# Altium PCB PCB1.PcbDoc
Units mm, origin at the board's own origin, x right, y up, seen from the top; angles counter-clockwise.
Board outline 21 x 32 mm, 2 copper layers (Top Layer, Bottom Layer); 7 components, 5 nets, 28 pads, 6 vias.
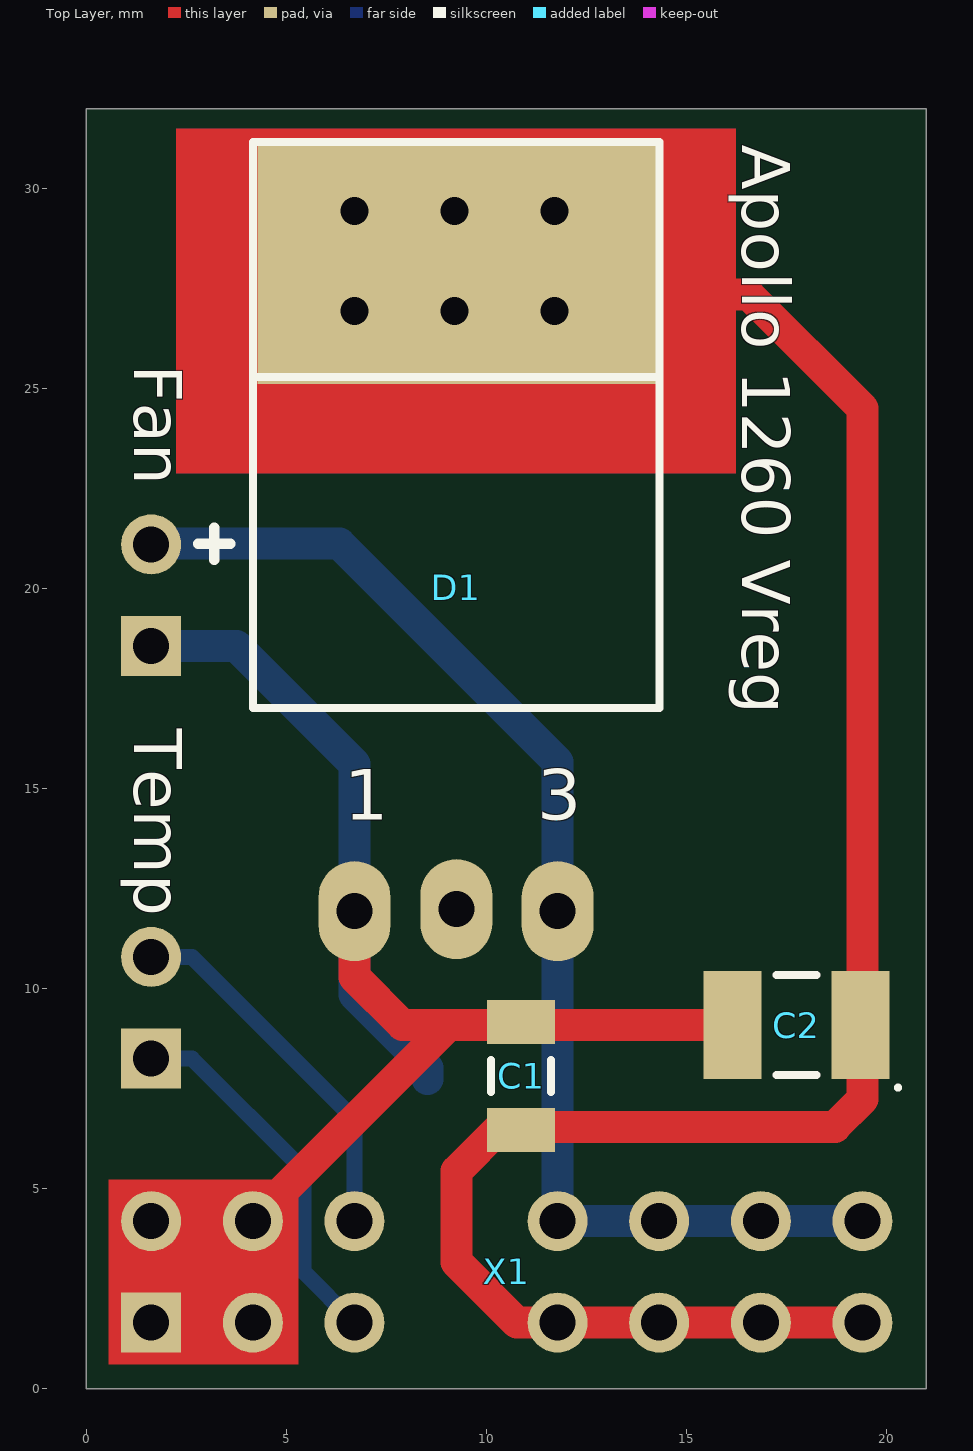
[diagram p0: Top Layer view]
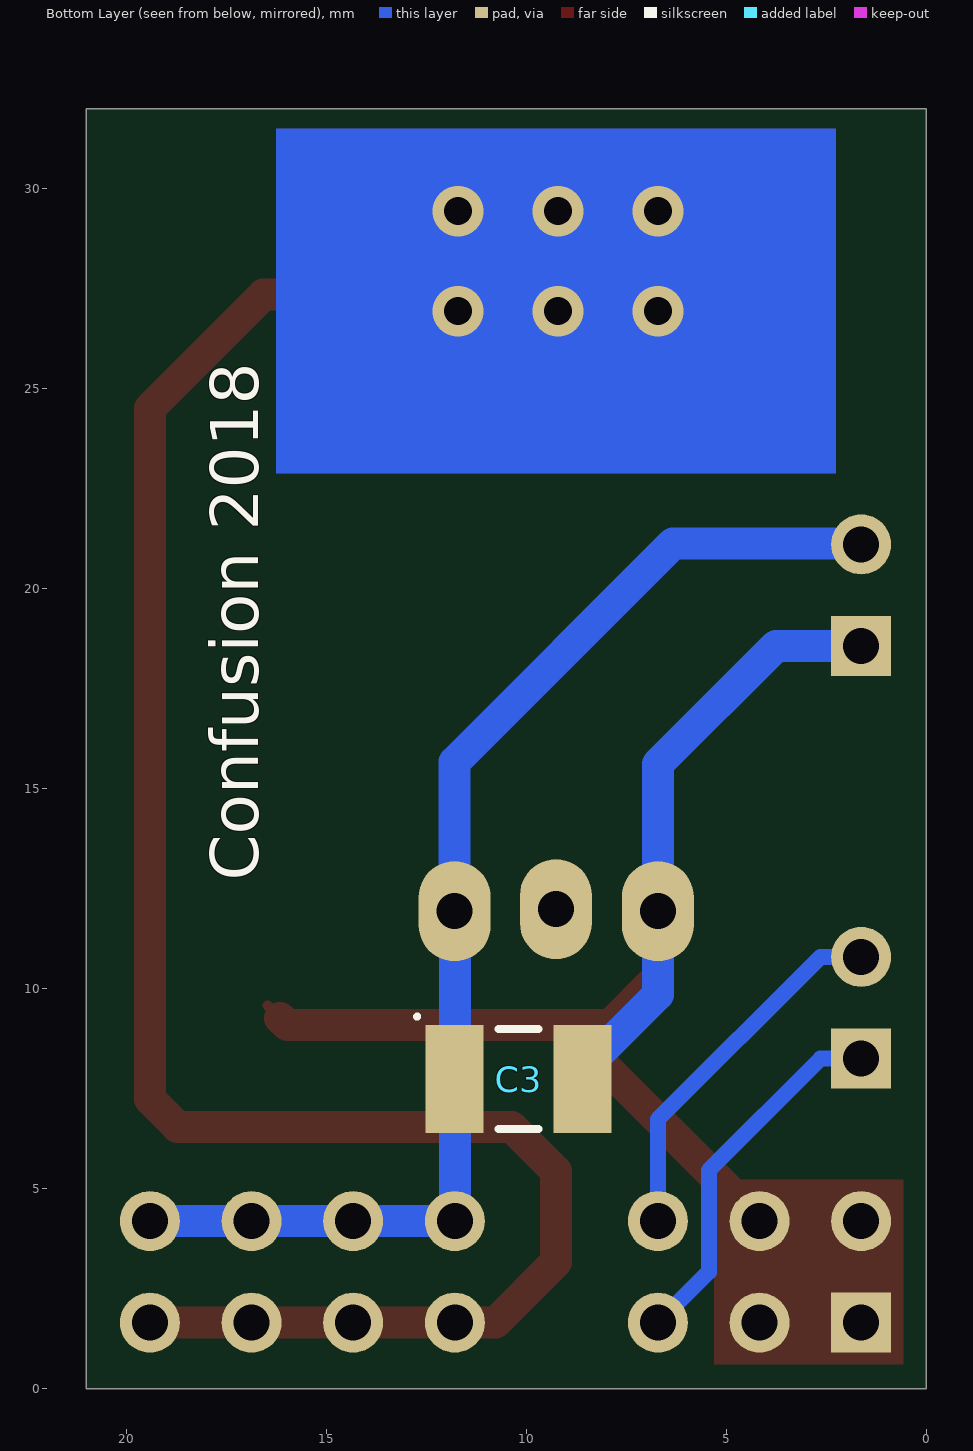
[diagram p1: Bottom Layer view, seen from below]

## Layer stack, top to bottom
Top Solder: solder mask 0.0102, Solder Resist, Dk 3.5
Top Layer: signal copper 0.0356
Dielectric 1: dielectric 0.32, FR-4, Dk 4.8
Bottom Layer: signal copper 0.0356
Bottom Solder: solder mask 0.0102, Solder Resist, Dk 3.5

## Board outline
0,0 21,0 21,32 0,32

## Design rules (kind name [scope] priority, off if disabled: settings)
AssemblyTestPointUsage [All] p1 off:
AssemblyTestpoint [All] p1 off: testpointundercomponent=TRUE minsize=1.016 maxsize=2.54 preferedsize=1.524 minholesize=0 maxholesize=1.016 preferedholesize=0.813 testpointgrid=0.025 usegrid=TRUE gridtolerance=0 allowsidetop=TRUE allowsidebottom=TRUE
Clearance [All] p1: gap=0.2 ignorepadtopadclearanceinfootprint=FALSE except(0: Arc-Hole Track-Hole SMDPad-Hole THPad-Hole Via-Hole Fill-Hole Poly-Hole Region-Hole Text-Hole)
DiffPairsRouting [All] p1 off: maxlimit=0.254 minlimit=0.254 mostfreqgap=0.254 toplayer_minwidth=0.381 toplayer_maxwidth=0.381 toplayer_prefwidth=0.381 bottomlayer_minwidth=0.381 bottomlayer_maxwidth=0.381 bottomlayer_prefwidth=0.381 maxuncoupledlength=12.7
FabricationTestPointUsage [All] p1 off: valid=0 allowmultiple=FALSE
FabricationTestpoint [All] p1 off: side=3 testpointundercomponent=TRUE minsize=1.016 maxsize=2.54 preferedsize=1.524 minholesize=0 maxholesize=1.016 preferedholesize=0.813 testpointgrid=0.025 allowsidetop=TRUE allowsidebottom=TRUE usegrid=TRUE gridtolerance=0
FanoutControl Fanout_BGA [IsBGA] p1 off: bgadir=Out bgaviamode=Centered fanoutstyle=Auto fanoutdirection=Alternating viagrid=0.025 // Fanout_BGA (Default Rule)
FanoutControl Fanout_LCC [IsLCC] p2 off: bgadir=Out bgaviamode=Centered fanoutstyle=Auto fanoutdirection=Alternating viagrid=0.025 // Fanout_LCC (Default Rule)
FanoutControl Fanout_SOIC [IsSOIC] p3 off: bgadir=Out bgaviamode=Centered fanoutstyle=Auto fanoutdirection=Alternating viagrid=0.025 // Fanout_SOIC (Default Rule)
FanoutControl Fanout_Small [(CompPinCount < 5)] p4 off: bgadir=Out bgaviamode=Centered fanoutstyle=Auto fanoutdirection=OutThenIn viagrid=0.025 // Fanout_Small (Default Rule)
FanoutControl Fanout_Default [All] p5 off: bgadir=Out bgaviamode=Centered fanoutstyle=Auto fanoutdirection=Alternating viagrid=0.025 // Fanout_Default (Default Rule)
Height [All] p1 off: minheight=0 maxheight=25.4 prefheight=12.7
HoleSize [All] p1: absolutevalues=TRUE maxlimit=2.54 minlimit=0.5 maxpercent=80.000 minpercent=20.000
MinimumAnnularRing [All] p1: minimumring=0.25
PolygonConnect [All] p1: connectstyle=Relief reliefconductorwidth=0.254 reliefentries=4 polygonreliefangle="90 Angle" airgapwidth=0.254
RoutingVias [All] p1: holewidth=0.711 width=1.27 viastyle="Through Hole" minholewidth=0.711 minwidth=1.27 maxholewidth=0.711 maxwidth=1.27
SolderMaskExpansion [All] p1: expansion=0.102
Width [All] p1: maxlimit=1 minlimit=0.125 preferedwidth=0.8
18 further rules are at their usual default settings.

## Components (designator, comment, footprint, x,y, rotation, side; value= is the part's Value field where it differs from the comment)
C1 "Cap 1206" C1206 10.874,7.818 r90 top
C2 "Cap D" CAPCP3825X06N 17.757,9.088 r180 top
C3 "Cap D" CAPCP3825X06N 10.188,7.742 r180 bottom
D1 "LM1084IT-3.3/NOPB" TO220HS 6.706,11.938 r0 top
Fan "Fan_connector" HDR1X2 1.626,18.567 r90 top (schematic designator X3)
Temp "TH_connector" HDR1X2 1.626,8.255 r90 top (schematic designator X2)
X1 "Apollo_Vreg_connector" Apollo_Vreg_connector 1.626,1.651 r0 top

## Footprints (in the part's own frame and the unit in brackets; to place one, negate y for a bottom-side part, rotate by r counter-clockwise, add the part's x,y. Pads: shape width x height; smd on the part's side, far side on the other; paste and mask are expansions set on the pad)
Apollo_Vreg_connector [mm] "Connector; Header; 8x2 Position"
  rect 1.5x1.5 hole 0.9: 1(0,0)
  round 1.5 hole 0.9: 2(0,2.54) 3(2.54,0) 4(2.54,2.54) 5(5.08,0) 6(5.08,2.54) 7(10.16,0) 8(10.16,2.54) 9(12.7,0) 10(12.7,2.54) 11(15.24,0) 12(15.24,2.54) 13(17.78,0) 14(17.78,2.54)
C1206 [mm] "Chip Capacitor, Body 3.2x1.6mm, IPC High Density"
  rect 1.1x1.7 smd: 1(-1.35,0) 2(1.35,0)
  silkscreen extent -0.4,-0.75 0.4,0.75, body extent -1.7,-0.9 1.7,0.9, height 1.3
CAPCP3825X06N [mm] "Chip Capacitor, 2-Leads, Body 3,81x2,54mm, IPC Medium Density"
  rect 1.45x2.7 smd: 1(-1.6,0) 2(1.6,0)
  silkscreen extent -2.59,-1.25 0.5,1.61, body extent -1.91,-1.27 1.91,1.27, height 0.6
HDR1X2 [mm] "Connector; Header; 2 Position"
  rect 1.5x1.5 hole 0.9: 1(0,0)
  round 1.5 hole 0.9: 2(2.54,0)
TO220HS [mm]
  oval 1.8x2.5 hole 0.9: 1(0.003,-0.001) 2(2.55,0.05) 3(5.083,-0.001)
  rect 10x6 smd: 4(2.575,16.175)
  silkscreen extent -2.54,5.08 7.62,19.23, body extent -2.5,-0.32 7.66,19.17, height 4.3

## Part data
C1: "Capacitor (Semiconductor SIM Model)"
C2 C3: "Polarized Capacitor (Surface Mount)"

## Via types
v1: diameter 1.27, hole 0.7, Top Layer to Bottom Layer, tented bottom, 6 vias

## Nets (pads, with @x,y where several pads share a name; then routed paths per layer and width w, separated by ;. In a path a pad name is that pad's centre, name@x,y a point inside that pad or via, vN(x,y) a via of type N, cw(c..) or ccw(c..) an arc to the next point about the centre after c; other vN are vias at no path point)
3.3V: C1.1 C2.1 D1.4 X1.7 X1.9 X1.11 X1.13 | length 52.5
  Top Layer w0.8: D1.4@9.281,27.351 16.566,27.351 19.406,24.511 19.406,7.239 18.715,6.548 10.366,6.548 9.256,5.438 9.256,3.165 10.77,1.651 X1.7 X1.9 X1.11 X1.13
  other v1: 6.706,26.938 9.206,26.938 11.706,26.938 6.706,29.438 9.206,29.438 11.706,29.438
5V: C3.1 D1.3 Fan.2 X1.8 X1.10 X1.12 X1.14 | length 31.4
  Bottom Layer w0.254: D1.3@11.786,11.172 D1.3@11.788,11.175
  Bottom Layer w0.8: Fan.2@1.78,20.975 1.933,21.128 6.327,21.128 11.788,15.666 D1.3@11.788,11.175 ; D1.3@11.786,11.172 X1.8 X1.10 X1.12 X1.14
GND: C1.2 C2.2 C3.2 D1.1 Fan.1 X1.1 X1.2 X1.3 X1.4 | length 34.5
  Top Layer w0.254: C2.2@16.155,9.271 C2.2@16.462,9.578
  Top Layer w0.8: X1.4 9.063,9.088 ; D1.1 6.708,10.292 7.912,9.088 15.972,9.088 C2.2@16.155,9.271
  Bottom Layer w0.8: Fan.1@1.396,18.337 Fan.1@1.904,18.337 ; Fan.1 3.756,18.567 6.708,15.615 D1.1 6.708,9.85 8.535,8.023 C3.2@8.535,7.747
TH1: Temp.1 X1.5 | length 9.3
  Bottom Layer w0.4: Temp.1 2.642,8.255 5.436,5.461 5.436,2.921 X1.5
TH2: Temp.2 X1.6 | length 9.4
  Top Layer w0.254: Temp.2@1.626,10.668 Temp.2
  Bottom Layer w0.4: Temp.2 2.642,10.795 6.706,6.731 X1.6
pads on no net: D1.2

## Other copper
Top Layer:
  rectangle net GND: 0.561,0.604 5.309,5.227
  rectangle net 3.3V: 2.25,22.88 16.25,31.5
Bottom Layer:
  rectangle net 3.3V: 2.25,22.881 16.25,31.5

## Silkscreen, mask and mechanical layers (free items; w line width, h text height)
Top Overlay:
  lines w0.254: 2.8,21.124 3.6,21.124 ; 3.2,20.724 3.2,21.524
  text "Apollo 1260 Vreg" at 16.4,31.1 h1.2 r270
Bottom Overlay:
  text "Confusion 2018" at 16.7,12.7 h1.2 r270

## Text inside footprints (layer, text, board x,y; h text height)
D1: Top Overlay "1" at 6.452,14.224 h1.27; Top Overlay "3" at 11.278,14.224 h1.27